# EAGLE board IOB-RR-CirKits_array (EAGLE 7.7.0)
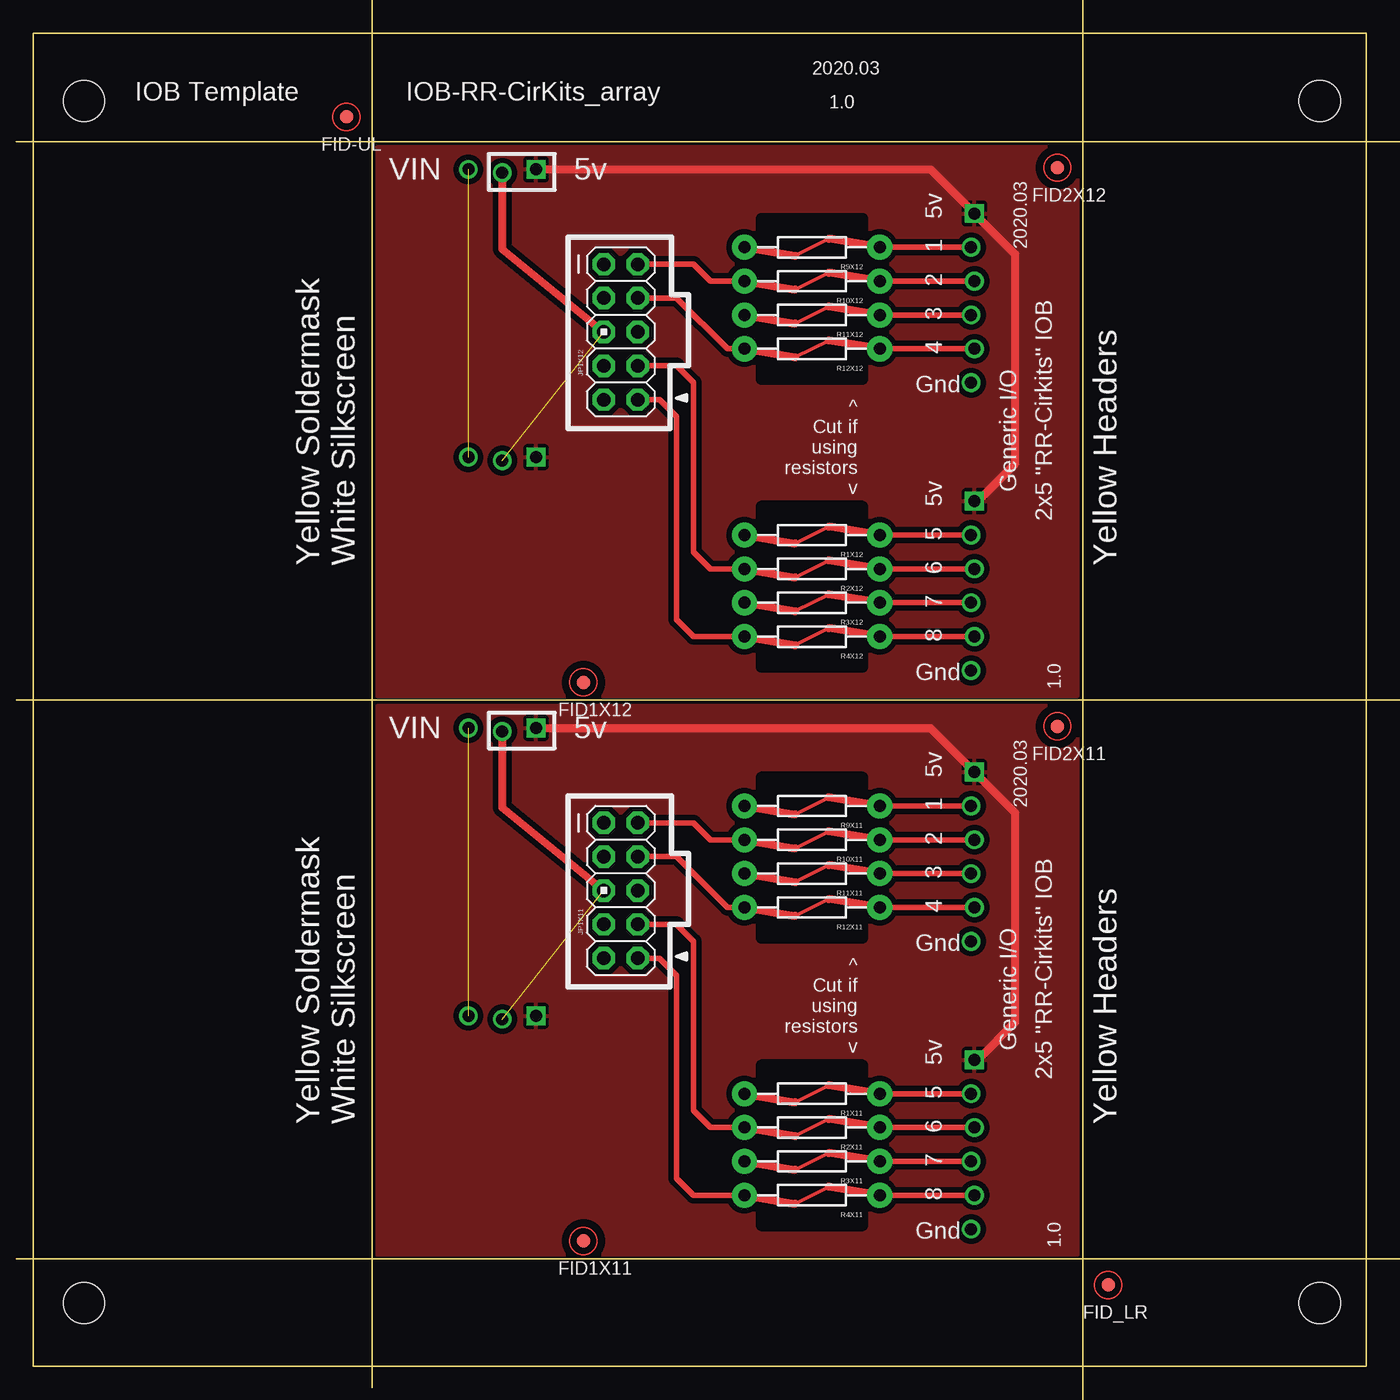
[diagram p0: board, top side]
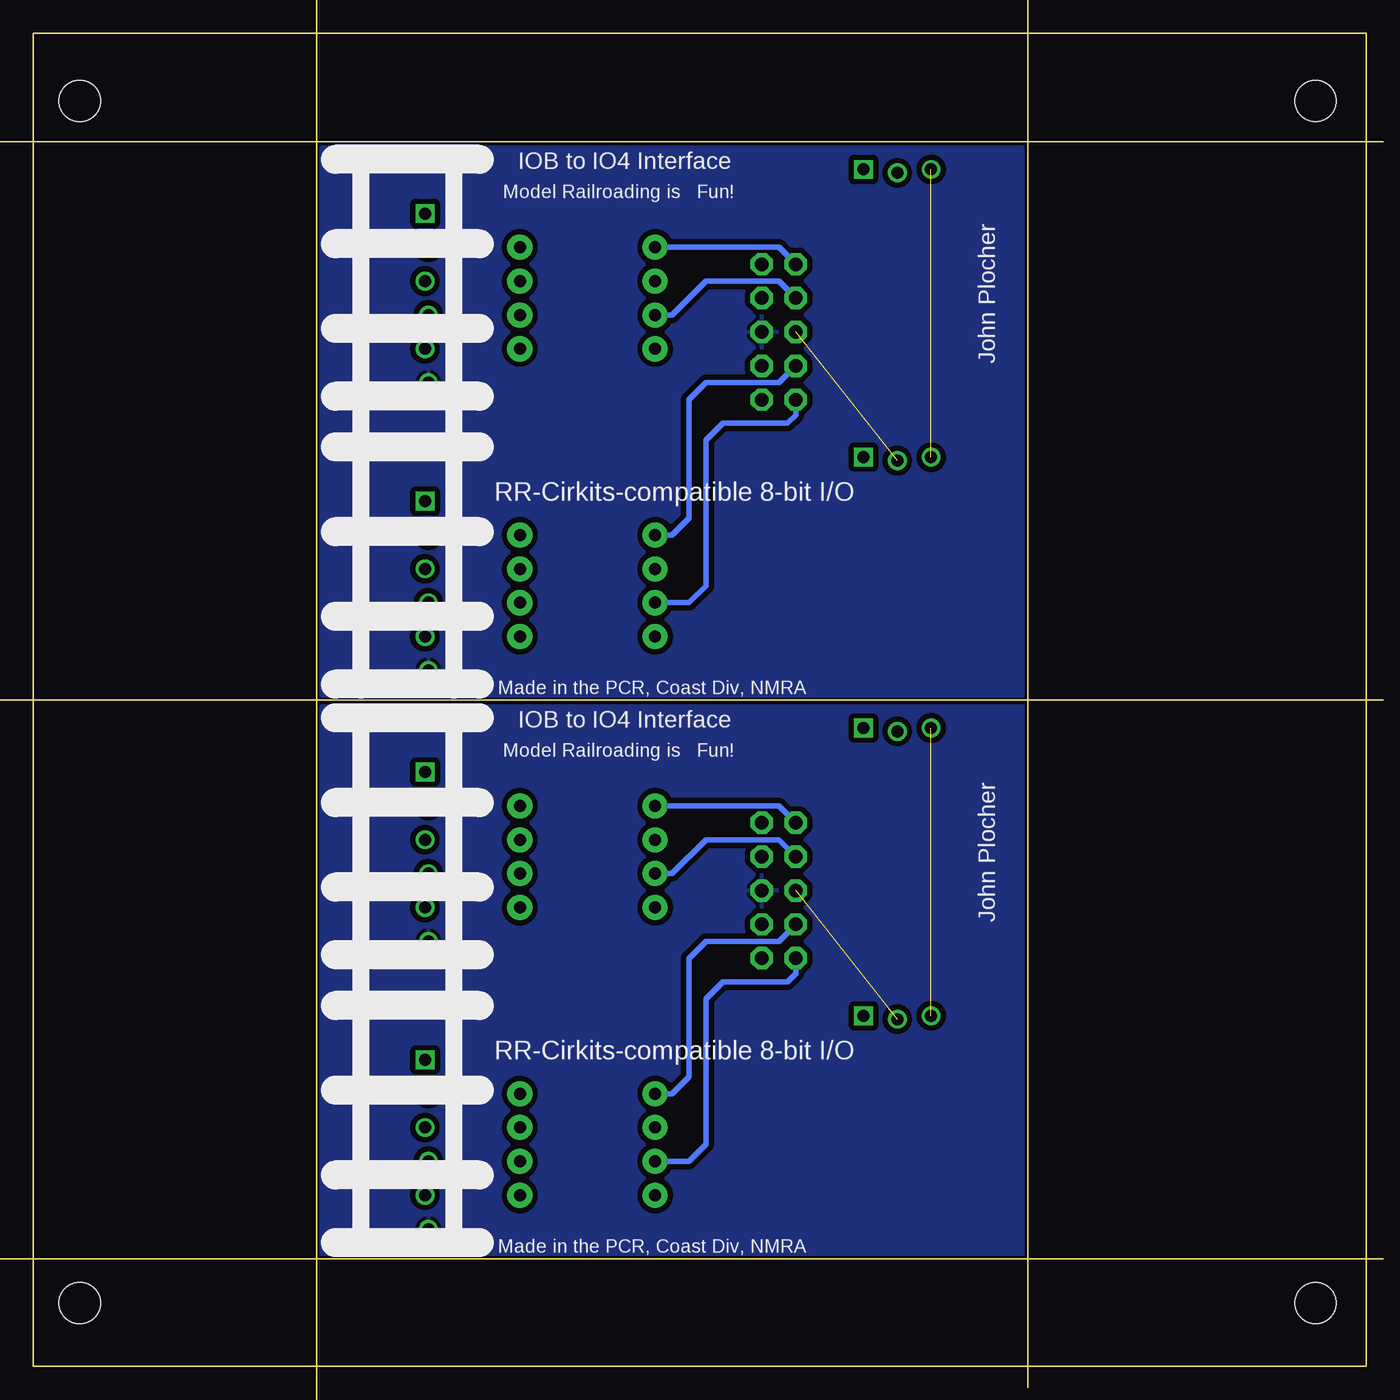
[diagram p1: board, bottom side, seen from below]

Size 100 x 100 mm. Coordinates in mm from the lower left corner, seen from the top.
Copper layers (1*16): Top 0.035mm / dielectric 1.5mm / Bottom 0.035mm
Design rules "default": minimum track width 10mil, minimum drill 0.6mm, track to track 8mil, track to pad 8mil, pad to pad 8mil, via to via 8mil, smd to smd 8mil, copper to edge 40mil, drill to drill 8mil, minimum pad ring 10mil, minimum via ring 8mil, stop-mask expansion 4mil, vias tented up to drill 0mil, thermal gap 10mil
tRestrict: area 54.6,32.1 to 62.2,44.2; area 54.6,10.5 to 62.2,22.6; area 54.6,74 to 62.2,86.1; area 54.6,52.5 to 62.2,64.5

## Footprints (pad centres in the part's own frame; a part is rotated, then mirrored left to right if it is on the bottom)
FIDUCIAL_1MM = smd 1 x 1: 1 0,0
AVR_ICSP = drill 1.016 pad 1.676 octagon: 1 -1.27,5.08; 2 1.27,5.08; 3 -1.27,2.54; 4 1.27,2.54; 5 -1.27,0; 6 1.27,0; 7 -1.27,-2.54; 8 1.27,-2.54; 9 -1.27,-5.08; 10 1.27,-5.08
CUT-R = drill 0.9 pad 1.88: P1 5.08,0; P2 -5.08,0
BOARD-DINRAIL-3.17IN-H2X-IOB = hole 3.1: 96.52,94.92; 96.52,4.75; 3.81,94.92; 3.81,4.75
10X-IOB = drill 0.9: G@1 44.958,23.876; G@3 44.958,2.286; IO1 44.958,34.036; IO2 45.212,31.496; IO3 44.958,28.956; IO4 45.212,26.416; IO5 44.958,12.446; IO6 45.212,9.906; IO7 44.958,7.366; IO8 45.212,4.826; V+ 7.239,18.288; V+@1 7.239,39.878; VOUT 9.779,18.034; VOUT@1 9.779,39.624 | drill 0.9 square: V5 12.319,18.288; V5@1 45.212,14.986; V5@2 45.212,36.576; V5@3 12.319,39.878

## Placement (x,y rotation side)
FID1X11  FIDUCIAL  [FIDUCIAL_1MM]  41.27,9.4 0 top
FID1X12  FIDUCIAL  [FIDUCIAL_1MM]  41.27,51.31 0 top
FID2X11  FIDUCIAL  [FIDUCIAL_1MM]  76.83,48.01 0 top
FID2X12  FIDUCIAL  [FIDUCIAL_1MM]  76.83,89.92 0 top
FID-UL  FIDUCIAL  [FIDUCIAL_1MM]  23.5,93.73 0 top
FID_LR  FIDUCIAL  [FIDUCIAL_1MM]  80.64,6.1 0 top
JP1X11  CONNECTOR-M05X2PTH  [AVR_ICSP]  44.07,35.69 0 top
JP1X12  CONNECTOR-M05X2PTH  [AVR_ICSP]  44.07,77.6 0 top
R1X11  NOSTUFF  [CUT-R]  58.42,20.45 180 top
R1X12  NOSTUFF  [CUT-R]  58.42,62.36 180 top
R2X11  NOSTUFF  [CUT-R]  58.42,17.91 180 top
R2X12  NOSTUFF  [CUT-R]  58.42,59.82 180 top
R3X11  NOSTUFF  [CUT-R]  58.42,15.37 180 top
R3X12  NOSTUFF  [CUT-R]  58.42,57.28 180 top
R4X11  NOSTUFF  [CUT-R]  58.42,12.83 180 top
R4X12  NOSTUFF  [CUT-R]  58.42,54.74 180 top
R9X11  NOSTUFF  [CUT-R]  58.42,42.04 180 top
R9X12  NOSTUFF  [CUT-R]  58.42,83.95 180 top
R10X11  NOSTUFF  [CUT-R]  58.42,39.5 180 top
R10X12  NOSTUFF  [CUT-R]  58.42,81.41 180 top
R11X11  NOSTUFF  [CUT-R]  58.42,36.96 180 top
R11X12  NOSTUFF  [CUT-R]  58.42,78.87 180 top
R12X11  NOSTUFF  [CUT-R]  58.42,34.42 180 top
R12X12  NOSTUFF  [CUT-R]  58.42,76.33 180 top
U$1X1  [BOARD-DINRAIL-3.17IN-H2X-IOB]  0,0 0 top
U$1X11  IO4-IOB-DUALRR-CIRKITS  [10X-IOB]  25.4,8 0 top
U$1X12  IO4-IOB-DUALRR-CIRKITS  [10X-IOB]  25.4,49.91 0 top

## Library data of the parts
FID1X11 FID1X12 FID2X11 FID2X12 FID-UL FID_LR JP1X11 JP1X12 R1X11 R1X12 R2X11 R2X12 R3X11 R3X12 R4X11 R4X12 R9X11 R9X12 R10X11 R10X12 R11X11 R11X12 R12X11 R12X12 U$1X1 U$1X11 U$1X12 = SPCoast

## Nets
!IO1X11: JP1X11.1 R9X11.P1
!IO1X12: JP1X12.1 R9X12.P1
!IO2X11: JP1X11.2 R10X11.P1
!IO2X12: JP1X12.2 R10X12.P1
!IO3X11: JP1X11.3 R11X11.P1
!IO3X12: JP1X12.3 R11X12.P1
!IO4X11: JP1X11.4 R12X11.P1
!IO4X12: JP1X12.4 R12X12.P1
!IO5X11: JP1X11.7 R1X11.P1
!IO5X12: JP1X12.7 R1X12.P1
!IO6X11: JP1X11.8 R2X11.P1
!IO6X12: JP1X12.8 R2X12.P1
!IO7X11: JP1X11.9 R3X11.P1
!IO7X12: JP1X12.9 R3X12.P1
!IO8X11: JP1X11.10 R4X11.P1
!IO8X12: JP1X12.10 R4X12.P1
GNDX11: JP1X11.6 U$1X11.G@1 U$1X11.G@3
GNDX12: JP1X12.6 U$1X12.G@1 U$1X12.G@3
IO1X11: R9X11.P2 U$1X11.IO1
IO1X12: R9X12.P2 U$1X12.IO1
IO2X11: R10X11.P2 U$1X11.IO2
IO2X12: R10X12.P2 U$1X12.IO2
IO3X11: R11X11.P2 U$1X11.IO3
IO3X12: R11X12.P2 U$1X12.IO3
IO4X11: R12X11.P2 U$1X11.IO4
IO4X12: R12X12.P2 U$1X12.IO4
IO5X11: R1X11.P2 U$1X11.IO5
IO5X12: R1X12.P2 U$1X12.IO5
IO6X11: R2X11.P2 U$1X11.IO6
IO6X12: R2X12.P2 U$1X12.IO6
IO7X11: R3X11.P2 U$1X11.IO7
IO7X12: R3X12.P2 U$1X12.IO7
IO8X11: R4X11.P2 U$1X11.IO8
IO8X12: R4X12.P2 U$1X12.IO8
VCCIOX11: U$1X11.V+ U$1X11.V+@1
VCCIOX12: U$1X12.V+ U$1X12.V+@1
VCCX11: U$1X11.V5 U$1X11.V5@1 U$1X11.V5@2 U$1X11.V5@3
VCCX12: U$1X12.V5 U$1X12.V5@1 U$1X12.V5@2 U$1X12.V5@3
VOUTX11: JP1X11.5 U$1X11.VOUT U$1X11.VOUT@1
VOUTX12: JP1X12.5 U$1X12.VOUT U$1X12.VOUT@1

## Tracks (layer width: path | path; a pad name or v marks a point on that pad's centre or on a via)
!IO1X11
  Bottom 0.406: JP1X11.1 44.07,42.04 R9X11.P1
!IO1X12
  Bottom 0.406: JP1X12.1 44.07,83.95 R9X12.P1
!IO2X11
  Top 0.406: R10X11.P1 50.8,39.5 49.53,40.77 JP1X11.2
!IO2X12
  Top 0.406: R10X12.P1 50.8,81.41 49.53,82.68 JP1X12.2
!IO3X11
  Bottom 0.406: JP1X11.3 44.07,39.5 49.53,39.5 52.07,36.96 R11X11.P1
!IO3X12
  Bottom 0.406: JP1X12.3 44.07,81.41 49.53,81.41 52.07,78.87 R11X12.P1
!IO4X11
  Top 0.406: R12X11.P1 52.07,34.42 48.26,38.23 JP1X11.4
!IO4X12
  Top 0.406: R12X12.P1 52.07,76.33 48.26,80.14 JP1X12.4
!IO5X11
  Bottom 0.406: JP1X11.7 44.07,31.88 49.53,31.88 50.8,30.61 50.8,21.72 52.07,20.45 R1X11.P1
!IO5X12
  Bottom 0.406: JP1X12.7 44.07,73.79 49.53,73.79 50.8,72.52 50.8,63.63 52.07,62.36 R1X12.P1
!IO6X11
  Top 0.406: R2X11.P1 50.8,17.91 49.53,19.18 49.53,31.88 48.26,33.15 JP1X11.8
!IO6X12
  Top 0.406: R2X12.P1 50.8,59.82 49.53,61.09 49.53,73.79 48.26,75.06 JP1X12.8
!IO7X11
  Bottom 0.406: JP1X11.9 42.8,29.46 43.43,28.83 48.26,28.83 49.53,27.56 49.53,16.64 50.8,15.37 R3X11.P1
!IO7X12
  Bottom 0.406: JP1X12.9 42.8,71.37 43.43,70.74 48.26,70.74 49.53,69.47 49.53,58.55 50.8,57.28 R3X12.P1
!IO8X11
  Top 0.406: R4X11.P1 49.53,12.83 48.26,14.1 48.26,29.34 46.99,30.61 JP1X11.10
!IO8X12
  Top 0.406: R4X12.P1 49.53,54.74 48.26,56.01 48.26,71.25 46.99,72.52 JP1X12.10
GNDX11
  pour Bottom (isolate 0.406): 25.78,49.53 25.78,8.38 78.36,8.38 78.36,49.53
GNDX12
  pour Bottom (isolate 0.406): 25.78,91.44 25.78,50.29 78.36,50.29 78.36,91.44
IO1X11
  Top 0.406: R9X11.P2 U$1X11.IO1
IO1X12
  Top 0.406: R9X12.P2 U$1X12.IO1
IO2X11
  Top 0.406: R10X11.P2 U$1X11.IO2
IO2X12
  Top 0.406: R10X12.P2 U$1X12.IO2
IO3X11
  Top 0.406: R11X11.P2 U$1X11.IO3
IO3X12
  Top 0.406: R11X12.P2 U$1X12.IO3
IO4X11
  Top 0.406: R12X11.P2 U$1X11.IO4
IO4X12
  Top 0.406: R12X12.P2 U$1X12.IO4
IO5X11
  Top 0.406: R1X11.P2 U$1X11.IO5
IO5X12
  Top 0.406: R1X12.P2 U$1X12.IO5
IO6X11
  Top 0.406: R2X11.P2 U$1X11.IO6
IO6X12
  Top 0.406: R2X12.P2 U$1X12.IO6
IO7X11
  Top 0.406: R3X11.P2 U$1X11.IO7
IO7X12
  Top 0.406: R3X12.P2 U$1X12.IO7
IO8X11
  Top 0.406: R4X11.P2 U$1X11.IO8
IO8X12
  Top 0.406: R4X12.P2 U$1X12.IO8
VCCIOX11  (1 unrouted)
VCCIOX12  (1 unrouted)
VCCX11
  Top 0.61: U$1X11.V5@3 67.31,47.88 73.66,41.53 73.66,25.78 70.87,22.99 U$1X11.V5@1
  pour Top (isolate 0.406): 25.78,49.53 25.78,8.38 78.36,8.38 78.36,49.53
VCCX12
  Top 0.61: U$1X12.V5@3 67.31,89.79 73.66,83.44 73.66,67.69 70.87,64.9 U$1X12.V5@1
  pour Top (isolate 0.406): 25.78,91.44 25.78,50.29 78.36,50.29 78.36,91.44
VOUTX11  (1 unrouted)
  Top 0.61: U$1X11.VOUT@1 35.18,41.91 JP1X11.5
VOUTX12  (1 unrouted)
  Top 0.61: U$1X12.VOUT@1 35.18,83.82 JP1X12.5

## Text on the board
Pads: JP1 | R1 | R2 | R3 | R4 | JP1 | R1 | R2 | R3 | R4
tPlace: 2020.03 | 1.0 | 2020.03 | 2x5 "RR-Cirkits" IOB | Generic I/O | ^ / Cut if / using / resistors / v | Yellow Soldermask / White Silkscreen | Yellow Headers | 1.0 | 2020.03 | 2x5 "RR-Cirkits" IOB | Generic I/O | ^ / Cut if / using / resistors / v | Yellow Soldermask / White Silkscreen | Yellow Headers | 1.0
bPlace: John Plocher | RR-Cirkits-compatible 8-bit I/O | John Plocher | RR-Cirkits-compatible 8-bit I/O
_tNames: R9 | R10 | R11 | R12 | JP1 | R1 | R2 | R3 | R4 | R9 | R10 | R11 | R12 | JP1 | R1 | R2 | R3 | R4